# Altium PCB EMG_MainBoard_Layout.PcbDoc (part 7 of 7)
Units mm, origin at the board's own origin, x right, y up, seen from the top; angles counter-clockwise.
Board outline 59.1 x 36 mm, 6 copper layers (L1 TOP, L2 GND, L3 SIGNAL, L4 GND, L5 POWER SIGNAL, L6 BOTTOM), stack 1.146 mm thick; 231 components, 136 nets, 812 pads, 470 vias.
Unrouted connection lines stored in the file: 570.
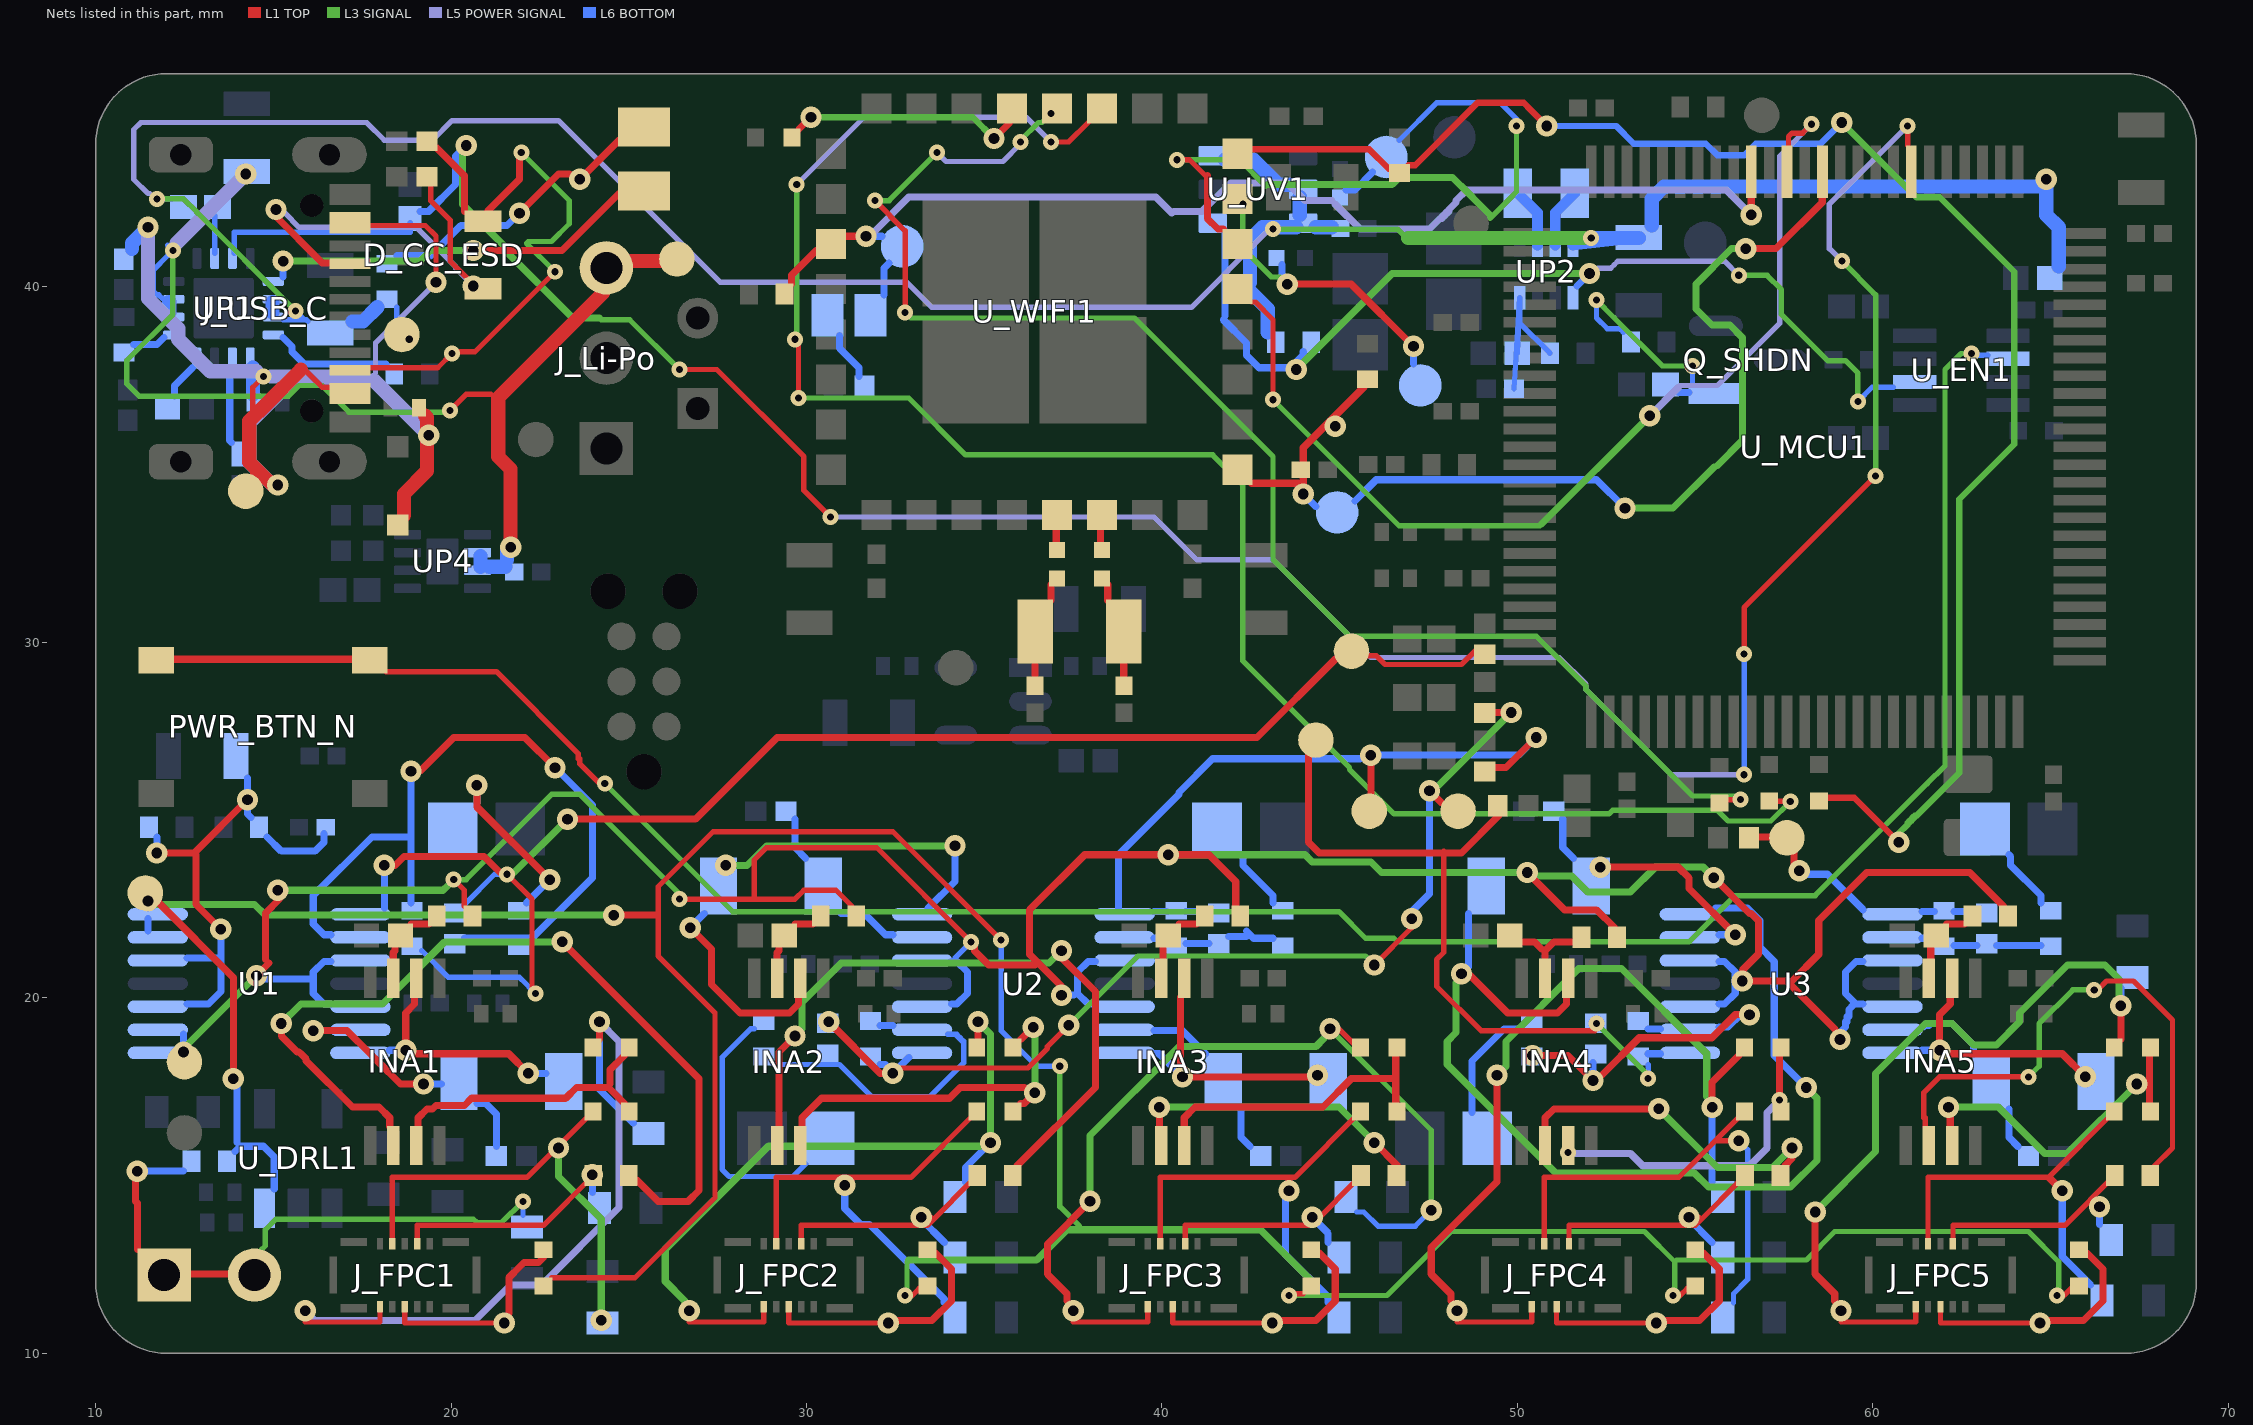
[diagram p8: the nets of this part, all layers, seen from the top]

## Via types
v1: diameter 0.6, hole 0.3, L1 TOP to L6 BOTTOM, 327 vias
v2: diameter 0.45, hole 0.2, L1 TOP to L6 BOTTOM, 138 vias
v3: diameter 0.5, hole 0.3, L1 TOP to L6 BOTTOM, 5 vias

## Nets (pads, with @x,y where several pads share a name; then routed paths per layer and width w, separated by ;. In a path a pad name is that pad's centre, name@x,y a point inside that pad or via, vN(x,y) a via of type N, cw(c..) or ccw(c..) an arc to the next point about the centre after c; other vN are vias at no path point) (continued)
NetC_WIFI_X32_IN_2: C_WIFI_X32_IN.2 R_WIFI_X32_IN.1 X_WIFI_32K.1 | length 0.9
  L1 TOP w0.2: X_WIFI_32K.1@38.475,31.175 R_WIFI_X32_IN.1@38.475,31.625 ; C_WIFI_X32_IN.2@38.925,29.025 X_WIFI_32K.1@38.925,29.425
NetC_WIFI_X32_OUT_2: C_WIFI_X32_OUT.2 R_WIFI_X32_OUT.1 X_WIFI_32K.2 | length 0.9
  L1 TOP w0.2: C_WIFI_X32_OUT.2@36.425,29.025 X_WIFI_32K.2@36.425,29.425 ; X_WIFI_32K.2@36.875,31.175 R_WIFI_X32_OUT.1@36.875,31.625
NetCH_1_2: CH_1.2 RG_1.1 RGN_1.2 U1.2 | length 21.1
  L1 TOP w0.2: v1(18.875,26.375) 19.125,26.375 20.075,27.325 22.075,27.325 v1(22.925,26.475)
  L6 BOTTOM w0.2: U1.2@16.625,21.775 16.425,21.775 16.125,22.075 16.125,22.875 17.775,24.525 18.775,24.525 ; RG_1.1@18.875,22.675 v1(18.875,26.375) ; CH_1.2@20.375,21.675 22.275,21.675 23.975,23.375 23.975,25.425 v1(22.925,26.475)
NetCH_2_2: CH_2.2 RG_2.1 RGN_2.2 U2.2 | length 7.7
  L6 BOTTOM w0.15: RGN_2.2@29.075,18.125 30.925,18.125 31.825,17.225 33.475,17.225 34.425,18.175 34.425,18.775 34.375,18.775 34.375,18.825 34.325,18.825 34.325,18.875 34.275,18.875 34.275,18.925 34.225,18.925 34.225,18.975 U2.2@33.975,18.975
  L6 BOTTOM w0.2: RG_2.1@32.075,19.225 32.425,19.225
NetCH_3_2: CH_3.2 RG_3.1 RGN_3.2 U2.9 | length 2.3
  L6 BOTTOM w0.2: U2.9@39.775,21.675 RG_3.1@40.125,21.675 ; RG_3.1@40.675,21.525 CH_3.2@41.325,21.525 ; CH_3.2@41.875,21.725 42.375,21.725 ; 42.375,21.875 42.575,21.675 RGN_3.2@43.125,21.675
NetCH_4_2: CH_4.2 RG_4.1 RGN_4.2 U3.2 | length 8.7
  L1 TOP w0.2: v1(50.425,18.375) 51.425,18.375 v1(52.125,17.675) ; v1@52.375,17.825 53.425,18.875 55.475,18.875 56.125,19.525 v1(56.525,19.525)
  L6 BOTTOM w0.2: v1(52.125,17.675) CH_4.2@52.125,18.175 ; RG_4.1@53.675,19.125 U3.2@54.025,19.125 ; U3.2@55.675,19.175 55.925,19.175 56.275,19.525 v1(56.525,19.525)
NetCH_5_2: CH_5.2 RG_5.1 RGN_5.2 U3.9 | length 2.2
  L6 BOTTOM w0.2: U3.9@61.375,21.675 RG_5.1@61.725,21.675 ; RG_5.1@62.275,21.475 CH_5.2@62.925,21.475 ; CH_5.2@63.475,21.475 RGN_5.2@64.725,21.475
NetCL_1_1: CL_1.1 RGN_1.1 | length 4.9
  L1 TOP w0.2: v1(20.725,25.975) 20.725,25.375 v1(22.775,23.325)
  L6 BOTTOM w0.2: CL_1.1@20.725,25.475 v1(20.725,25.975) ; RGN_1.1@22.125,22.675 v1(22.775,23.325)
NetCL_2_1: CL_2.1 RGN_2.1 | length 7
  L6 BOTTOM w0.15: RGN_2.1@28.525,19.125 28.425,19.125 27.625,18.325 27.625,15.175 27.825,14.975 29.625,14.975 CL_2.1@29.975,15.325
NetCL_3_1: CL_3.1 RGN_3.1 | length 1.7
  L6 BOTTOM w0.2: CL_3.1@42.225,24.025 42.275,23.975 42.275,23.725 43.125,22.875 RGN_3.1@43.125,22.675
NetCL_4_1: CL_4.1 RGN_4.1 | length 3.2
  L6 BOTTOM w0.2: CL_4.1@48.725,16.775 48.725,18.225 49.625,19.125 RGN_4.1@50.125,19.125
NetCL_5_1: CL_5.1 RGN_5.1 | length 1.7
  L6 BOTTOM w0.2: CL_5.1@63.825,24.025 63.875,23.975 63.875,23.725 64.725,22.875 RGN_5.1@64.725,22.675
NetCservo_1_1: Cservo_1.1 Rservo_1.1 U1.6 | length 6.3
  L1 TOP w0.2: v1(16.125,19.075) 17.075,19.075 17.72,18.43 17.95,18.2 18.575,17.575 v1(19.225,17.575)
  L6 BOTTOM w0.2: v1(16.125,19.075) U1.6@16.625,19.075 ; v1(19.225,17.575) Cservo_1.1@19.725,17.575 ; Cservo_1.1@20.725,17.025 20.975,17.025 21.275,16.725 21.275,15.825
NetCservo_2_1: Cservo_2.1 Rservo_2.1 U2.6 | length 2.9
  L6 BOTTOM w0.2: Rservo_2.1@29.675,25.025 29.675,24.225 Cservo_2.1@29.975,23.925 ; Cservo_2.1@30.975,22.375 31.625,22.375 32.225,21.775 U2.6@32.425,21.775
NetCservo_3_1: Cservo_3.1 Rservo_3.1 U2.13 | length 2.9
  L6 BOTTOM w0.2: U2.13@39.775,19.075 40.575,19.075 Cservo_3.1@41.225,18.425 ; Cservo_3.1@42.225,16.875 42.225,16.075 42.475,15.825
NetCservo_4_1: Cservo_4.1 Rservo_4.1 U3.6 | length 6.4
  L1 TOP w0.2: v1(52.325,23.675) 54.525,23.675 54.825,23.375 54.825,23.075 v1(56.125,21.775)
  L6 BOTTOM w0.2: Rservo_4.1@51.275,25.025 51.275,24.225 Cservo_4.1@51.575,23.925 ; U3.6@55.675,21.775 v1(56.125,21.775)
NetCservo_5_1: Cservo_5.1 Rservo_5.1 U3.13 | length 3.1
  L6 BOTTOM w0.2: U3.13@61.375,19.175 61.425,19.175 61.475,19.225 61.575,19.225 61.625,19.275 62.225,19.275 62.825,18.675 Cservo_5.1@62.825,18.425 ; Cservo_5.1@63.825,16.875 63.825,16.075 64.075,15.825
NetCUP4_FB_1: CUP4_FB.1 RUP_3.1 RUP_4.2 UP2.8 | length 6.1
  L6 BOTTOM w0.15: CUP4_FB.1@49.902,37.133 UP2.8@50.062,39.699 ; RUP_3.1@49.99,38.134 UP2.8@50.062,39.699 ; RUP_4.2@50.912,38.134 50.062,38.984 UP2.8@50.062,39.699
NetD_CC_ESD_1: D_CC_ESD.1 J_USB_C.A5 RJ1.2 | length 11.4
  L1 TOP w0.15: RJ1.2@19.425,42.875 19.425,42.425 19.975,41.875 19.975,40.725 20.425,40.275
  L1 TOP w0.2: v1(15.075,42.175) 15.075,42.1 15.075,41.975 16.3,40.75 16.375,40.675 16.575,40.675
  L5 POWER SIGNAL w0.15: v1@15.325,42.075 15.725,41.675 16.3,41.675 19.025,41.675 20.125,40.575 20.125,40.525 v1(20.625,40.025)
NetD_CC_ESD_2: D_CC_ESD.2 J_USB_C.B5 RJ2.2 | length 15.2
  L1 TOP w0.15: J_USB_C.B5@17.675,37.725 19.625,37.725 v2(20.025,38.125) ; v2@20.225,38.175 20.675,38.175 v2(22.925,40.425)
  L1 TOP w0.2: RJ2.2@19.575,43.925 20.375,43.125 D_CC_ESD.2@20.375,42.125 ; D_CC_ESD.2@21.025,42.125 21.925,43.025 v2@21.925,43.575
  L3 SIGNAL w0.15: v2(21.975,43.775) 23.325,42.425 23.325,41.775 22.825,41.275 22.175,41.275 22.125,41.225 v2(22.925,40.425)
NetINA1_2: INA1.2 RDD2.2 | length 24.2
  L1 TOP w0.2: v1(15.225,19.275) 15.225,18.925 15.675,18.475 15.725,18.475 15.77,18.43 15.925,18.275 15.925,18.225 17.225,16.925 17.95,16.925 17.975,16.925 18.275,16.625 INA1.2@18.275,16.375 ; v1(23.125,21.575) 26.975,17.725 26.975,14.575 26.675,14.275 25.825,14.275 RDD2.2@25.225,14.875
  L3 SIGNAL w0.2: v1(15.225,19.275) 15.775,19.825 18.075,19.825 19.825,21.575 v1(23.125,21.575)
NetINA1_3: INA1.3 RDD1.2 RDD3.2 | length 7.6
  L1 TOP w0.2: INA1.3@19.075,16.375 19.075,16.625 19.325,16.875 19.475,16.875 19.575,16.975 20.375,16.975 20.575,17.175 23.225,17.175 23.525,17.475 24.425,17.475 RDD1.2@24.875,17.025 ; 24.475,17.575 24.475,17.975 RDD3.2@24.875,18.375
NetINA1_7: INA1.7 RH_1.2 RL_1.1 | length 0.9
  L1 TOP w0.2: INA1.7@18.375,21.075 18.375,21.275 18.425,21.325 RH_1.2@18.425,21.475 ; RH_1.2@18.875,22.075 RL_1.1@19.375,22.075
NetINA2_2: INA2.2 RDD5.2 | length 19
  L1 TOP w0.2: INA2.2@29.225,16.375 29.225,18.475 v1(29.675,18.925) ; RDD5.2@35.925,15.275 38.125,17.475 38.125,20.175 37.175,21.125 v1(37.175,21.325)
  L3 SIGNAL w0.2: v1(29.675,18.925) 29.875,19.125 29.875,19.875 30.975,20.975 36.825,20.975 v1(37.175,21.325)
NetINA2_3: INA2.3 RDD4.2 RDD6.2 | length 9.7
  L1 TOP w0.2: INA2.3@29.875,16.375 29.875,16.625 30.425,17.175 34.025,17.175 34.325,17.475 36.125,17.475 ; RDD4.2@36.025,17.025 36.125,17.025 v1(36.425,17.325) ; RDD6.2@36.025,18.825 v1(36.375,19.175)
  L3 SIGNAL w0.2: v1(36.375,19.175) 36.425,19.125 v1(36.425,17.325)
NetINA2_7: INA2.7 RH_2.2 RL_2.1 | length 0.9
  L1 TOP w0.2: INA2.7@29.175,21.075 29.175,21.275 29.225,21.325 RH_2.2@29.225,21.475 ; RH_2.2@29.675,22.075 RL_2.1@30.175,22.075
NetINA3_2: INA3.2 RDD8.2 | length 7.9
  L1 TOP w0.2: INA3.2@39.925,16.375 v1(39.925,16.925) ; v1(45.975,15.925) RDD8.2@46.625,15.275
  L3 SIGNAL w0.2: v1(39.925,16.925) 44.975,16.925 v1(45.975,15.925)
NetINA3_3: INA3.3 RDD7.2 RDD9.2 | length 7.9
  L1 TOP w0.2: INA3.3@40.625,16.375 40.625,16.625 40.925,16.925 44.525,16.925 45.325,17.725 46.475,17.725 ; RDD7.2@46.575,17.025 RDD9.2@46.575,18.375
NetINA3_7: INA3.7 RH_3.2 RL_3.1 | length 0.9
  L1 TOP w0.2: INA3.7@40.025,21.075 RH_3.2@40.025,21.475 ; RH_3.2@40.475,22.075 RL_3.1@40.975,22.075
NetINA4_2: INA4.2 RDD11.2 | length 8.8
  L1 TOP w0.2: INA4.2@50.775,16.375 50.775,16.625 51.025,16.875 v1(53.975,16.875) ; RDD11.2@57.525,15.275 57.725,15.475 v1(57.725,15.775)
  L3 SIGNAL w0.2: v1(53.975,16.875) 55.625,15.225 57.175,15.225 v1(57.725,15.775)
NetINA4_3: INA4.3 RDD10.2 RDD12.2 | length 8.4
  L1 TOP w0.2: RDD10.2@57.375,17.025 RDD12.2@57.375,18.375
  L5 POWER SIGNAL w0.2: v2@51.625,15.625 53.175,15.625 53.525,15.275 56.525,15.275 57.025,15.775 57.025,16.775 v2@57.225,16.975
  other v2: 51.425,15.65 57.375,17.125
NetINA4_7: INA4.7 RH_4.2 RL_4.1 | length 1.8
  L1 TOP w0.2: RH_4.2@50.075,21.575 50.475,21.575 50.675,21.375 ; INA4.7@50.775,21.075 50.775,21.325 51.025,21.575 RL_4.1@51.575,21.575
NetINA5_2: INA5.2 RDD14.2 | length 14.8
  L1 TOP w0.15: INA5.2@61.475,16.375 61.475,16.625 61.425,16.625 61.425,17.325 61.875,17.775 v2(64.375,17.775) ; v2(66.225,20.225) 66.325,20.225 66.575,20.475 67.325,20.475 68.425,19.375 68.425,15.775 RDD14.2@67.925,15.275
  L3 SIGNAL w0.15: v2(64.375,17.775) 64.675,18.075 64.675,19.275 65.625,20.225 v2(66.225,20.225)
NetINA5_3: INA5.3 RDD13.2 RDD15.2 | length 8.8
  L1 TOP w0.2: v1(62.125,16.925) 62.175,16.875 INA5.3@62.175,16.375 ; v1(67.425,17.575) v1@67.675,17.575 ; RDD13.2@67.775,17.025 RDD15.2@67.775,18.375
  L3 SIGNAL w0.2: v1(62.125,16.925) 63.525,16.925 64.825,15.625 65.475,15.625 v1(67.425,17.575)
NetINA5_7: INA5.7 RH_5.2 RL_5.1 | length 0.9
  L1 TOP w0.2: INA5.7@61.625,21.075 RH_5.2@61.625,21.475 ; RH_5.2@62.075,22.075 RL_5.1@62.575,22.075
NetJ_FPC1_8: J_FPC1.8 R_VREF1.2 | length 5.5
  L1 TOP w0.15: J_FPC1.8@18.7,11.17 18.7,10.85 v1(21.5,10.85)
  L1 TOP w0.2: 21.625,11.125 21.625,12.125 21.939,12.439 22.053,12.553 22.459,12.553 22.6,12.694 R_VREF1.2@22.6,12.912
NetJ_FPC2_8: J_FPC2.8 R_VREF2.2 | length 6.4
  L1 TOP w0.15: J_FPC2.8@29.5,11.17 29.5,10.85 v1(32.3,10.85)
  L1 TOP w0.2: v1@32.575,10.925 33.525,10.925 34.075,11.475 34.075,12.375 R_VREF2.2@33.625,12.825
NetJ_FPC3_8: J_FPC3.8 R_VREF3.2 | length 6.4
  L1 TOP w0.15: J_FPC3.8@40.3,11.17 40.3,10.85 v1(43.1,10.85)
  L1 TOP w0.2: v1@43.375,10.925 44.325,10.925 44.875,11.475 44.875,12.375 R_VREF3.2@44.425,12.825
NetJ_FPC4_8: J_FPC4.8 R_VREF4.2 | length 6.4
  L1 TOP w0.15: J_FPC4.8@51.1,11.17 51.1,10.85 v1(53.9,10.85)
  L1 TOP w0.2: v1@54.175,10.925 55.125,10.925 55.675,11.475 55.675,12.375 R_VREF4.2@55.225,12.825
NetJ_FPC5_8: J_FPC5.8 R_VREF5.2 | length 6.4
  L1 TOP w0.15: J_FPC5.8@61.9,11.17 61.9,10.85 v1(64.7,10.85)
  L1 TOP w0.2: v1@64.975,10.925 65.925,10.925 66.475,11.475 66.475,12.375 R_VREF5.2@66.025,12.825
NetJ_REF_1: J_REF.1 J_REF.2 R_DRL_SEL.2 R_ref.1 | length 13.3
  L1 TOP w0.2: 11.175,12.925 11.175,14.225 11.125,14.275 11.125,15.075 v1(11.175,15.125) ; J_REF.1@12.625,12.225 J_REF.2@13.725,12.225
  L3 SIGNAL w0.15: 14.675,12.925 14.775,13.025 14.775,13.278 14.775,13.475 15.075,13.775 15.106,13.775 17.95,13.775 20.625,13.775 20.725,13.675 21.425,13.675 v2(22.025,14.275)
  L6 BOTTOM w0.15: R_DRL_SEL.2@22.025,13.875 v2(22.025,14.275)
  L6 BOTTOM w0.2: v1(11.175,15.125) 11.906,15.125 R_ref.1@12.475,15.125
NetJP_WIFI_BOOT_1: JP_WIFI_BOOT.1 R_WIFI_BOOT_OVR.2 | length 1.4
  L6 BOTTOM w0.2: JP_WIFI_BOOT.1@30.925,38.625 30.925,38.275 31.475,37.725 R_WIFI_BOOT_OVR.2@31.475,37.475
NetL1_1: L1.1 UP2.3 | length 1.7
  L6 BOTTOM w0.3: UP2.3@51.062,41.169 51.062,42.083 L1.1@51.612,42.634
NetL1_2: L1.2 UP2.2 | length 1.7
  L6 BOTTOM w0.3: L1.2@50.012,42.634 50.562,42.083 UP2.2@50.562,41.169
NetLED_CHG_A: LED_CHG.A R_CHG_LED.2 | length 7.4
  L1 TOP w0.2: v1(21.925,42.075) 23.025,43.175 23.325,43.175 ; v1(23.625,43.025) LED_CHG.A@24.725,44.125
  L6 BOTTOM w0.2: R_CHG_LED.2@18.475,40.875 19.425,40.875 20.275,41.725 21.575,41.725 v1(21.925,42.075)
NetLED_CHG_C: LED_CHG.C UP1.9 | length 10.7
  L1 TOP w0.2: v1(20.625,41.025) 23.125,41.025 LED_CHG.C@24.725,42.625
  L3 SIGNAL w0.2: v1(15.275,40.725) 16.3,40.725 19.125,40.725 19.425,41.025 v1(20.625,41.025)
  L6 BOTTOM w0.2: 15.275,40.275 v1(15.275,40.725)
NetPWR_BTN_N_A: PWR_BTN_N.A PWR_BTN_N.B U_EN1.2 | length 66.8
  L1 TOP w0.15: PWR_BTN_N.B@18.175,29.175 21.275,29.175 23.575,26.875 23.575,26.725 23.625,26.725 23.625,26.575 24.175,26.025 v2(24.325,26.025)
  L1 TOP w0.2: PWR_BTN_N.A@12.175,29.525 PWR_BTN_N.B@17.225,29.525
  L3 SIGNAL w0.15: v2(24.325,26.025) 27.925,22.425 44.975,22.425 45.725,21.675 46.525,21.675 46.625,21.575 54.825,21.575 56.125,22.875 58.375,22.875 61.524,26.024 62.025,26.525 62.025,37.675 62.475,38.125 v2(62.775,38.125)
  L6 BOTTOM w0.15: v2(62.775,38.125) 62.825,38.075 U_EN1.2@63.225,38.075
NetQ_SHDN_1: Q_SHDN.1 R_SHDN_G.1 R_SHDN_PD.2 | length 5.7
  L3 SIGNAL w0.15: v2(52.225,39.625) 52.722,39.128 54.075,37.775 v2(54.925,37.775)
  L6 BOTTOM w0.15: v2(52.225,39.625) 52.225,39.125 52.525,38.825 52.722,38.825 52.875,38.825 R_SHDN_PD.2@52.975,38.725 ; Q_SHDN.1@54.925,37.275 v2(54.925,37.775)
  L6 BOTTOM w0.2: R_SHDN_G.1@54.525,37.025 Q_SHDN.1@54.825,37.025
NetR_EN1_BIAS_2: R_EN1_BIAS.2 UP1.6 | length 1.1
  L6 BOTTOM w0.15: UP1.6@13.35,40.95 R_EN1_BIAS.2@13.35,42
NetR_LIM_2: R_LIM.2 UP1.12 | length 3.3
  L6 BOTTOM w0.2: UP1.12@15.275,38.575 15.525,38.325 15.525,38.175 15.875,37.825 16.3,37.825 R_LIM.2@18.175,37.825
NetR_TMR_2: R_TMR.2 UP1.14 | length 2.1
  L6 BOTTOM w0.2: UP1.14@13.775,37.725 13.775,36.7 13.775,35.675 R_TMR.2@13.825,35.625
NetRISET_1: RISET.1 UP1.16 | length 1
  L6 BOTTOM w0.2: 12.225,36.925 12.225,37.225 12.725,37.725
SYS_EN: R_EN.2 U_EN1.6 U_UV1.1 UP2.5 | length 26.3
  L3 SIGNAL w0.15: v2(56.225,40.325) 57.025,40.325 57.425,39.925 57.425,39.225 58.725,37.925 59.225,37.925 59.575,37.575 v2(59.575,36.775)
  L3 SIGNAL w0.2: v1(43.775,37.675) 46.475,40.375 ; 46.525,40.375 48.605,40.375 48.902,40.375 51.725,40.375
  L5 POWER SIGNAL w0.15: v1@52.275,40.525 52.625,40.525 52.722,40.622 52.825,40.725 55.825,40.725 v2(56.225,40.325)
  L6 BOTTOM w0.15: v2(59.575,36.775) 59.975,37.175 U_EN1.6@60.575,37.175
  L6 BOTTOM w0.2: 41.725,39.075 42.375,38.425 42.375,38.075 42.725,37.725 43.625,37.725 43.975,38.075 R_EN.2@43.975,38.175 ; 41.775,39.175 U_UV1.1@41.775,41.575 ; v1@43.725,37.725 v1(43.775,37.675) ; UP2.5@51.675,40.025 v1(52.025,40.375)
TS: R_TS_SER.2 UP1.1 | length 0.9
  L6 BOTTOM w0.2: R_TS_SER.2@11.075,38.375 11.725,38.375 UP1.1@11.925,38.575
USB_PGOOD_N: R_PGOOD.1 U_MCU1.82 UP1.7 | length 75.1
  L1 TOP w0.15: v2(26.425,37.675) 27.475,37.675 29.925,35.225 29.925,34.275 v2(30.675,33.525) ; v2(56.375,29.675) 56.375,30.975 v2(60.075,34.675) ; U_MCU1.82@60.975,43.975 v2(60.975,44.525)
  L3 SIGNAL w0.15: 24.225,39.075 25.025,39.075 v2(26.425,37.675) ; v2(59.125,40.725) 60.075,39.775 v2(60.075,34.675)
  L3 SIGNAL w0.2: v1(20.425,43.975) 20.325,43.875 20.325,42.325 21.525,41.125 21.525,41.025 23.425,39.125 24.175,39.125
  L5 POWER SIGNAL w0.15: v2(30.675,33.525) 39.775,33.525 40.975,32.325 43.125,32.325 45.875,29.575 48.605,29.575 51.175,29.575 51.925,28.825 51.925,28.675 54.325,26.275 v2(56.375,26.275) ; v2(59.125,40.725) 58.775,41.075 58.775,42.325 v2(60.975,44.525)
  L6 BOTTOM w0.15: UP1.7@13.9,40.95 13.9,41.54 18.85,41.54 R_PGOOD.1@18.85,41.8 ; v2(56.375,26.275) v2(56.375,29.675)
  L6 BOTTOM w0.2: R_PGOOD.1@19.125,42.125 19.375,42.125 20.125,42.875 20.125,43.675 v1(20.425,43.975)
Va_1: J_FPC1.2 R_DRL_VA1.1 RDD1.1 | length 13.5
  L1 TOP w0.15: J_FPC1.2@18.35,13.23 18.35,14.95 21.7,14.95 22.138,14.95 RDD1.1@23.988,16.8
  L3 SIGNAL w0.2: v1(23.025,15.775) 23.025,14.975 24.225,13.775 v1(24.225,10.925)
Va_2: J_FPC2.2 R_DRL_VA2.1 RDD4.1 | length 13
  L1 TOP w0.15: J_FPC2.2@29.15,13.23 29.15,14.95 32.5,14.95 32.938,14.95 RDD4.1@34.788,16.8
  L1 TOP w0.2: v1(31.075,14.725) v1@31.275,14.925
  L6 BOTTOM w0.2: v1(31.075,14.725) 31.075,14.075 31.525,13.625 31.775,13.625 33.875,11.525 R_DRL_VA2.1@33.875,11.425
Va_3: J_FPC3.2 R_DRL_VA3.1 RDD7.1 | length 12.2
  L1 TOP w0.15: J_FPC3.2@39.95,13.23 39.95,14.95 43.3,14.95 43.738,14.95 RDD7.1@45.588,16.8
  L1 TOP w0.2: v1(43.575,14.575) 43.575,14.925
  L6 BOTTOM w0.2: v1(43.575,14.575) 43.475,14.475 43.475,12.775 44.675,11.575 R_DRL_VA3.1@44.675,11.425
Va_4: J_FPC4.2 R_DRL_VA4.1 RDD10.1 | length 13.5
  L1 TOP w0.15: J_FPC4.2@50.75,13.23 50.75,14.95 54.1,14.95 54.538,14.95 RDD10.1@56.388,16.8 ; 55.625,15.975 v1(56.225,15.975)
  L6 BOTTOM w0.15: R_DRL_VA4.1@56.075,11.425 56.075,11.675 56.475,12.075 56.475,15.725 v1(56.225,15.975)
Va_5: J_FPC5.2 R_DRL_VA5.1 RDD13.1 | length 11.2
  L1 TOP w0.15: J_FPC5.2@61.55,13.23 61.55,14.95 64.9,14.95 64.938,14.95 RDD13.1@66.788,16.8
  L1 TOP w0.2: 64.975,14.925 v1(65.325,14.575)
  L6 BOTTOM w0.2: v1(65.325,14.575) 65.325,12.725 R_DRL_VA5.1@66.125,11.925
Vb_1: J_FPC1.4 R_DRL_VB1.1 RDD2.1 | length 6.4
  L1 TOP w0.15: J_FPC1.4@19.05,13.23 19.05,13.6 21.7,13.6 22.6,13.6 RDD2.1@24,15
  L6 BOTTOM w0.2: R_DRL_VB1.1@23.975,14.525 v1(23.975,15.025)
Vb_2: J_FPC2.4 R_DRL_VB2.1 RDD5.1 | length 7.1
  L1 TOP w0.15: J_FPC2.4@29.85,13.23 29.85,13.6 32.5,13.6 33.4,13.6 RDD5.1@34.8,15
  L1 TOP w0.2: v1(33.225,13.825) v1@33.475,13.825
  L6 BOTTOM w0.2: v1(33.225,13.825) 33.225,13.775 R_DRL_VB2.1@33.875,13.125
Vb_3: J_FPC3.4 R_DRL_VB3.1 RDD8.1 | length 6.8
  L1 TOP w0.15: J_FPC3.4@40.65,13.23 40.65,13.6 43.3,13.6 44.2,13.6 RDD8.1@45.6,15
  L1 TOP w0.2: v1(44.225,13.825) v1@44.275,13.825
  L6 BOTTOM w0.2: v1(44.225,13.825) 44.675,13.375 R_DRL_VB3.1@44.675,13.125
Vb_4: J_FPC4.4 R_DRL_VB4.1 RDD11.1 | length 7.1
  L1 TOP w0.15: J_FPC4.4@51.45,13.23 51.45,13.6 54.1,13.6 55,13.6 RDD11.1@56.4,15
  L1 TOP w0.2: v1(54.825,13.825) v1@55.075,13.825
  L6 BOTTOM w0.2: v1(54.825,13.825) 54.825,13.775 R_DRL_VB4.1@55.475,13.125
Vb_5: J_FPC5.4 R_DRL_VB5.1 RDD14.1 | length 6.3
  L1 TOP w0.15: J_FPC5.4@62.25,13.23 62.25,13.6 64.9,13.6 65.4,13.6 RDD14.1@66.8,15
  L1 TOP w0.2: v1@66.175,14.325 v1(66.375,14.125)
  L6 BOTTOM w0.2: 66.375,13.625 v1(66.375,14.125)
VBAT_CELL: C_BAT.1 CU6_1.2 J_Li-Po.3 pad.TP_VBAT_CELL UP1.2 UP1.3 UP4.2 UP4.3 | length 30.6
  L1 TOP w0.15: v2(19.975,36.525) 20.425,36.975 21.125,36.975
  L1 TOP w0.4: v1(21.675,32.675) 21.675,34.16 21.675,34.875 21.325,35.225 21.325,36.875 J_Li-Po.3@24.275,39.825 ; J_Li-Po.3@25.075,40.725 pad.TP_VBAT_CELL@25.875,40.725
  L3 SIGNAL w0.15: v2(12.175,41.025) 12.175,39.225 10.9,37.95 10.875,37.925 10.875,37.275 10.9,37.25 11.225,36.925 15.425,36.925 15.725,37.225 16.3,37.225 16.375,37.225 17.125,36.475 19.925,36.475 v2(19.975,36.525)
  L5 POWER SIGNAL w0.4: v2@12.275,41.225 13.15,42.1 v1(14.225,43.175)
  L6 BOTTOM w0.15: 11.875,39.675 11.775,39.775 11.725,39.775 11.625,39.875 11.625,40.475 v2@12.025,40.875 ; v2@12.025,41.175 v2(12.175,41.025)
  L6 BOTTOM w0.4: 12.075,39.275 UP1.3@12.075,39.575 ; UP4.3@20.825,32.125 UP4.2@20.825,32.425 ; UP4.3@21.075,32.125 CU6_1.2@21.525,32.125 ; 21.575,32.325 21.575,32.575 v1(21.675,32.675)
VBUS: C_IN_.1 C_VBUS.2 D_VBUS.1 J_USB_C.A4_B9 J_USB_C.B4_A9 pad.TP_VBUS R_TS_TOP.2 UP1.13 | length 36.2
  L1 TOP w0.15: 14.425,34.725 14.425,36.7 14.425,37.175 v2(14.725,37.475) ; 15.775,37.675 15.875,37.675 16.3,37.25 16.375,37.175 16.575,37.175 ; J_USB_C.A4_B9@17.675,41.725 19.275,41.725 19.575,41.425 v1(19.575,40.125)
  L1 TOP w0.4: v1(15.125,34.425) 14.975,34.425 14.325,35.075 14.325,36.225 14.8,36.7 15.775,37.675 ; D_VBUS.1@18.675,33.575 18.675,34.16 18.675,34.175 19.325,34.825 19.325,36.325 C_VBUS.2@19.275,36.375
  L5 POWER SIGNAL w0.15: 17.875,37.575 17.875,38.425 v1(19.575,40.125)
  L5 POWER SIGNAL w0.4: v1(11.475,41.675) 11.475,39.675 12.325,38.825 12.325,38.525 13.225,37.625 14.525,37.625 ; v2@14.925,37.475 16.3,37.475 16.925,37.475 17.275,37.125 ; v1(15.125,34.425) 14.975,34.425 14.325,35.075 14.325,36.175 14.85,36.7 15.525,37.375 16.3,37.375 17.625,37.375 ; 17.825,37.375 v1(19.375,35.825)
  L6 BOTTOM w0.15: v2@14.575,37.475 v2(14.725,37.475)
  L6 BOTTOM w0.4: 11.025,41.075 11.025,41.225 v1(11.475,41.675) ; C_IN_.1@14.425,36.975 UP1.13@14.425,37.725
Vc_1: J_FPC1.6 R_DRL_VC1.1 RDD3.1 | length 22.2
  L1 TOP w0.15: v1(15.9,11.2) 15.9,10.88 18,10.88 J_FPC1.6@18,11.17
  L1 TOP w0.2: RDD3.1@24.175,18.825 v1(24.175,19.325)
  L5 POWER SIGNAL w0.2: v1(15.9,11.2) 16.175,10.925 20.675,10.925 21.675,11.925 22.55,11.925 24.725,14.1 24.725,18.775 v1(24.175,19.325)
  L6 BOTTOM w0.2: v1(24.175,19.325) 24.175,17.425 R_DRL_VC1.1@25.125,16.475
Vc_2: J_FPC2.6 R_DRL_VC2.1 RDD6.1 | length 19.9
  L1 TOP w0.15: v1(26.7,11.2) 26.7,10.88 28.8,10.88 J_FPC2.6@28.8,11.17
  L1 TOP w0.2: RDD6.1@34.825,18.825 v1(34.825,19.325)
  L3 SIGNAL w0.2: 26.575,11.475 26.025,12.025 26.025,12.925 28.925,15.825 34.875,15.825 ; v1(34.825,19.325) 35.175,18.975 v1(35.175,15.925)
  L6 BOTTOM w0.2: R_DRL_VC2.1@34.475,14.825 34.475,15.225 v1(35.175,15.925)
Vc_3: J_FPC3.6 R_DRL_VC3.1 RDD9.1 | length 25.4
  L1 TOP w0.15: v1(37.5,11.2) 37.5,10.88 39.6,10.88 J_FPC3.6@39.6,11.17 ; v1(44.725,19.125) 44.975,19.125 RDD9.1@45.375,18.725
  L1 TOP w0.2: 37.325,11.475 37.325,11.675 36.775,12.225 36.775,13.075 v1(37.975,14.275)
  L3 SIGNAL w0.15: v1(44.725,19.125) 47.575,16.275 v1(47.575,14.025)
  L3 SIGNAL w0.2: v1(37.975,14.275) 37.975,16.125 40.475,18.625 44.325,18.625 v1@44.575,18.875
  L6 BOTTOM w0.15: R_DRL_VC3.1@45.475,13.975 45.675,13.975 46.075,13.575 47.125,13.575 v1(47.575,14.025)
Vc_4: J_FPC4.6 R_DRL_VC4.1 RDD12.1 | length 23.7
  L1 TOP w0.15: v1(48.3,11.2) 48.3,10.88 50.4,10.88 J_FPC4.6@50.4,11.17
  L1 TOP w0.2: 48.125,11.475 48.125,11.675 47.575,12.225 47.575,12.975 49.425,14.825 v1(49.425,17.825) ; v1(55.475,16.925) 55.475,17.625 RDD12.1@56.225,18.375
  L3 SIGNAL w0.2: v1(49.425,17.825) 49.675,18.075 49.675,18.775 51.725,20.825 52.925,20.825 55.325,18.425 55.325,17.225
  L6 BOTTOM w0.2: R_DRL_VC4.1@55.475,14.825 v1(55.475,16.925)
Vc_5: J_FPC5.6 R_DRL_VC5.1 RDD15.1 | length 20.9
  L1 TOP w0.15: v1(59.1,11.2) 59.1,10.88 61.2,10.88 J_FPC5.6@61.2,11.17
  L1 TOP w0.2: v1(58.375,13.975) 58.375,12.225 58.925,11.675 58.925,11.475 ; RDD15.1@66.975,18.825 v1(66.975,19.775)
  L3 SIGNAL w0.2: v1(58.375,13.975) 60.075,15.675 60.075,17.875 61.475,19.275 62.225,19.275 62.825,18.675 63.475,18.675 64.125,19.325 64.125,19.575 65.475,20.925 66.525,20.925 66.925,20.525 66.925,20.075
  L6 BOTTOM w0.2: v1(66.975,19.775) R_DRL_VC5.1@66.975,20.275
VDiv: Cdiv_1.2 Cdiv_10uF.2 RV1.1 RV2.2 U1.10 U1.12 | length 13
  L1 TOP w0.2: v1(11.725,24.075) 12.775,24.075 v1(14.275,25.575) ; 12.825,24.025 12.825,22.625 v1(13.525,21.925)
  L6 BOTTOM w0.2: v1(11.725,24.075) RV1.1@11.725,24.525 ; U1.10@12.575,19.825 13.175,19.825 13.525,20.175 v1(13.525,21.925) ; U1.12@12.575,21.125 13.425,21.125 ; Cdiv_10uF.2@14.275,26.175 14.275,25.175 RV2.2@14.375,25.075 ; RV2.2@14.825,24.525 15.225,24.125 16.175,24.125 16.425,24.375 Cdiv_1.2@16.425,24.625
VOUT_1: CH_1.1 pad.TP_VOUT_1 R_ADC1.1 RG_1.2 U1.1 | length 42.5
  L1 TOP w0.15: v2(21.575,23.475) 22.275,22.775 22.275,20.225 v2(22.375,20.125) ; pad.TP_VOUT_1@45.775,29.625 46.025,29.625 46.275,29.375 48.425,29.375 48.605,29.555 R_ADC1.1@48.825,29.775
  L1 TOP w0.2: v1(18.125,23.725) 18.425,23.725 18.675,23.975 20.925,23.975 v2@21.375,23.525 ; v1(23.275,25.025) 26.875,25.025 29.175,27.325 42.675,27.325 44.875,29.525
  L3 SIGNAL w0.2: v2@21.775,23.525 v1(23.275,25.025)
  L6 BOTTOM w0.15: RG_1.2@19.175,21.325 19.925,20.575 21.925,20.575 ; CH_1.1@20.375,22.625 21.225,23.475 v2(21.575,23.475) ; 21.975,20.525 v2(22.375,20.125)
  L6 BOTTOM w0.2: U1.1@18.125,22.525 v1(18.125,23.725)
VOUT_2: CH_2.1 pad.TP_VOUT_2 R_ADC2.1 RG_2.2 U2.1 | length 27.1
  L1 TOP w0.15: v1@32.675,18.025 36.225,18.025 36.775,18.575 36.775,18.625 v1(37.375,19.225) ; v1(45.975,20.925) v1@47.025,21.975
  L1 TOP w0.2: v1(30.625,19.325) 32.075,17.875 v1(32.425,17.875) ; v1(47.525,25.825) 47.875,25.475 ; R_ADC2.1@49.325,28.025 v1(49.825,28.025)
  L3 SIGNAL w0.15: v1(37.375,19.225) 39.325,21.175 45.725,21.175 v1(45.975,20.925)
  L3 SIGNAL w0.2: v1@47.775,25.975 48.605,26.805 v1(49.825,28.025)
  L6 BOTTOM w0.2: RG_2.2@32.075,18.125 32.225,18.125 ; v1(32.425,17.875) U2.1@32.875,18.325 ; v1(47.025,22.225) 47.025,22.425 47.525,22.925 v1(47.525,25.825)
VOUT_3: CH_3.1 pad.TP_VOUT_3 R_ADC3.1 RG_3.2 U2.8 | length 18
  L1 TOP w0.2: pad.TP_VOUT_3@45.875,25.725 v1(45.875,26.825) ; R_ADC3.1@49.325,26.475 49.675,26.475 v1(50.525,27.325)
  L6 BOTTOM w0.2: 38.775,22.525 38.775,24.025 40.475,25.725 40.475,25.775 41.425,26.725 45.575,26.725 ; U2.8@39.775,22.425 RG_3.2@40.125,22.425 ; RG_3.2@40.675,22.425 CH_3.1@41.325,22.425 ; v1(45.875,26.825) 48.605,26.825 50.025,26.825 v1(50.525,27.325)
VOUT_4: CH_4.1 pad.TP_VOUT_4 R_ADC4.1 RG_4.2 U3.1 | length 20.1
  L1 TOP w0.15: 47.925,24.125 47.925,21.275 47.725,21.075 47.725,20.325 48.975,19.075 v2@52.175,19.075
  L1 TOP w0.2: pad.TP_VOUT_4@44.125,26.825 44.125,24.375 44.425,24.075 48.425,24.075 R_ADC4.1@49.475,25.125
  L3 SIGNAL w0.15: v2(52.225,19.275) 53.675,17.825 v2(53.675,17.725)
  L6 BOTTOM w0.15: v2(53.675,17.725) RG_4.2@53.675,18.125
  L6 BOTTOM w0.2: RG_4.2@53.675,18.425 U3.1@54.025,18.425
VOUT_5: CH_5.1 pad.TP_VOUT_5 R_ADC5.1 RG_5.2 U3.8 | length 3.9
  L1 TOP w0.2: R_ADC5.1@56.725,24.525 pad.TP_VOUT_5@57.125,24.525 ; pad.TP_VOUT_5@57.775,24.075 57.775,23.725 v1(57.925,23.575)
  L6 BOTTOM w0.2: v1@58.175,23.475 58.725,23.475 59.725,22.475 ; U3.8@61.375,22.425 RG_5.2@61.725,22.425 ; RG_5.2@62.275,22.425 CH_5.1@62.925,22.425
VREF_A: pad.TP_VREF_A RL_1.2 RL_2.2 RL_3.2 RL_4.2 RL_5.2 U1.3 U1.5 U1.8 U1.9 U2.3 U2.5 U2.10 U2.12 U3.3 U3.5 U3.10 U3.12 | length 91.9
  L1 TOP w0.15: v2(20.075,23.325) 20.375,23.025 RL_1.2@20.375,22.575 ; v2(26.425,22.775) 29.675,22.775 29.925,23.025 30.825,23.025 RL_2.2@31.275,22.575 ; 28.525,22.825 28.525,23.875 28.875,24.225 31.975,24.225 v2(34.625,21.575)
  L1 TOP w0.2: v1(14.525,20.625) 14.875,20.975 ; 14.775,21.075 14.775,22.375 v1@15.175,22.775 ; v2@34.725,21.425 34.725,21.325 35.125,20.925 36.425,20.925 ; v1(37.175,20.075) 37.175,20.325 36.275,21.225 36.275,22.475 37.825,24.025 41.325,24.025 42.075,23.275 RL_3.2@42.075,22.575 ; v1(50.275,23.525) 51.325,22.475 52.225,22.475 RL_4.2@52.725,21.975 ; v1(55.525,23.375) 56.525,22.375 56.575,22.375 56.775,22.175 56.775,21.225 56.325,20.775 ; v1(56.325,20.475) 57.575,20.475 58.925,19.125 ; 57.725,20.475 58.475,21.225 58.475,22.175 59.825,23.525 62.725,23.525 RL_5.2@63.675,22.575
  L3 SIGNAL w0.15: v2(20.075,23.325) 20.425,23.325 22.825,25.725 23.625,25.725 26.425,22.925 v2(26.425,22.775)
  L3 SIGNAL w0.2: v1@12.625,18.725 v1(14.525,20.625) ; v1(15.125,23.025) 19.775,23.025 v2@19.925,23.175 ; v1(40.175,24.025) 44.025,24.025 44.225,23.825 45.875,23.825 46.175,23.525 v1(50.275,23.525) ; v1@50.525,23.425 51.525,23.425 51.975,22.975 53.175,22.975 53.875,23.675 55.225,23.675 v1(55.525,23.375)
  L6 BOTTOM w0.15: 34.175,21.125 v2(34.625,21.575)
  L6 BOTTOM w0.2: v1(12.475,18.475) U1.9@12.475,18.975 ; v1@14.775,20.525 16.025,20.525 ; U1.5@16.625,19.825 16.425,19.825 16.125,20.125 16.125,20.725 16.425,21.025 U1.3@16.625,21.025 ; U2.3@34.075,19.825 34.225,19.825 34.525,20.125 34.525,20.725 34.225,21.025 U2.5@34.075,21.025 ; v1(37.175,20.075) 37.525,20.075 ; U2.12@38.125,19.825 37.925,19.825 37.625,20.125 37.625,20.725 37.925,21.025 U2.10@38.125,21.025 ; U3.3@55.675,19.825 55.825,19.825 56.125,20.125 56.125,20.725 55.825,21.025 U3.5@55.675,21.025 ; v1@56.175,20.475 v1(56.325,20.475) ; v1(59.075,18.825) 59.075,19.025 59.225,19.175 59.225,19.325 59.275,19.325 59.275,19.475 59.325,19.475 59.325,19.675 59.425,19.775 ; U3.12@59.725,19.825 59.525,19.825 59.225,20.125 59.225,20.725 59.525,21.025 U3.10@59.725,21.025
VREF_B_SRC: pad.TP_VREF_B_SRC R_ref.2 R_VREF1.1 R_VREF2.1 R_VREF3.1 R_VREF4.1 R_VREF5.1 U1.13 U1.14 U_DRL1.3 | length 101.3
  L1 TOP w0.15: R_VREF1.1@22.825,12.125 25.175,12.125 27.425,14.375 27.425,19.575 25.825,21.175 25.825,23.125 27.375,24.675 32.425,24.675 v2(35.475,21.625) ; v2(32.775,11.625) 32.975,11.625 R_VREF2.1@33.175,11.825 ; v2(43.575,11.625) 43.625,11.675 R_VREF3.1@43.975,11.675 ; v2(54.375,11.625) 54.575,11.625 R_VREF4.1@54.775,11.825 ; v2(65.175,11.625) 65.375,11.625 R_VREF5.1@65.575,11.825
  L1 TOP w0.2: pad.TP_VREF_B_SRC@11.775,22.675 13.875,20.575 13.875,18.43 v1(13.875,17.725) ; v1(24.575,22.325) 25.775,22.325
  L3 SIGNAL w0.15: v2(32.775,11.625) 32.825,11.675 32.825,12.575 ; v2(37.125,18.075) 37.125,14.125 37.675,13.575 ; v2(43.575,11.625) 46.325,11.625 48.125,13.425 53.575,13.425 54.425,12.575 54.425,11.675 v2(54.375,11.625) ; 54.475,12.625 58.125,12.625 58.925,13.425 64.375,13.425 65.225,12.575 65.225,11.675 v2(65.175,11.625)
  L3 SIGNAL w0.2: v1@11.725,22.625 14.475,22.625 14.775,22.325 v1(24.575,22.325) ; 32.875,12.625 36.475,12.625 37.325,13.475 42.775,13.475 44.325,11.925 44.325,11.675
  L6 BOTTOM w0.15: v2(35.475,21.625) 35.475,19.075 36.475,18.075 v2(37.125,18.075)
  L6 BOTTOM w0.2: 11.475,21.875 U1.14@11.475,22.225 ; U1.14@11.475,22.525 v1(11.475,22.725) ; v1(13.875,17.725) 13.975,17.625 13.975,15.925 ; R_ref.2@13.925,15.675 14.028,15.778 14.075,15.825 14.725,15.825 14.772,15.778 15.025,15.525 U_DRL1.3@15.025,14.625
Vservo_1: Cservo_1.2 INA1.6 U1.7 | length 6
  L1 TOP w0.2: v1(18.725,18.525) 18.725,19.575 18.975,19.825 INA1.6@18.975,20.025 ; v1@18.975,18.425 21.625,18.425 v1(22.175,17.875)
  L6 BOTTOM w0.2: U1.7@18.275,18.525 v1(18.725,18.525) ; v1(22.175,17.875) Cservo_1.2@22.675,17.875
Vservo_2: Cservo_2.2 INA2.6 U2.7 | length 14.2
  L1 TOP w0.2: v1(26.725,21.975) 27.325,21.375 27.325,20.375 28.125,19.575 29.525,19.575 29.775,19.825 INA2.6@29.775,20.025
  L3 SIGNAL w0.2: v1(27.725,23.725) 28.325,23.725 28.875,24.275 v1(34.175,24.275)
  L6 BOTTOM w0.2: v1(26.725,21.975) Cservo_2.2@27.125,22.375 ; 33.425,22.525 34.175,23.275 v1(34.175,24.275)
Vservo_3: Cservo_3.2 INA3.6 U2.14 | length 6.8
  L1 TOP w0.2: 40.525,18.075 INA3.6@40.525,20.025 ; v1(40.575,17.775) 44.325,17.775 v1(44.375,17.825)
  L6 BOTTOM w0.2: U2.14@39.775,18.425 39.925,18.425 v1(40.575,17.775)
Vservo_4: Cservo_4.2 INA4.6 U3.7 | length 28.8
  L1 TOP w0.2: v1(48.425,20.675) 48.625,20.675 49.725,19.575 51.125,19.575 51.375,19.825 INA4.6@51.375,20.025
  L3 SIGNAL w0.2: v1@48.275,20.425 48.275,19.025 48.025,18.775 48.025,18.125 51.075,15.075 54.975,15.075 55.375,14.675 57.675,14.675 58.425,15.425 58.425,17.175 v1(58.125,17.475)
  L6 BOTTOM w0.2: v1(48.425,20.675) 48.625,20.875 Cservo_4.2@48.625,22.375 ; 55.575,22.525 56.475,22.525 56.825,22.175 56.825,21.425 57.225,21.025 57.225,18.375 v1(58.125,17.475)
Vservo_5: Cservo_5.2 INA5.6 U3.14 | length 6.2
  L1 TOP w0.2: v1(61.875,18.525) 61.875,19.525 62.175,19.825 INA5.6@62.175,20.025 ; v1@62.125,18.425 65.325,18.425 v1(65.975,17.775)
  L6 BOTTOM w0.2: U3.14@61.375,18.525 v1(61.875,18.525)
VSYS: C_OUT_.1 C_UV_BYPASS.1 CUP4_1.1 pad.TP_VSYS R_CHG_LED.1 R_EN1_1.1 R_EN1_BIAS.1 R_EN.1 U_UV1.3 U_UV1.5 U_UV1.6 UP1.10 UP1.11 UP2.4 | length 80
  L3 SIGNAL w0.15: v2(11.725,42.475) 12.475,42.475 12.85,42.1 ; 12.875,42.075 v2@15.475,39.475 ; v2(43.125,41.625) 46.625,41.625 46.875,41.375
  L3 SIGNAL w0.4: 46.925,41.375 48.605,41.375 48.902,41.375 v2@51.875,41.375
  L5 POWER SIGNAL w0.15: 11.525,42.625 11.475,42.625 11.075,43.025 11.075,44.425 11.275,44.625 17.625,44.625 18.125,44.125 19.475,44.125 20.025,44.675 23.025,44.675 27.525,40.175 27.575,40.125 32.825,40.125 33.525,39.425 40.825,39.425 v2@42.925,41.525
  L6 BOTTOM w0.15: v2(11.725,42.475) R_EN1_BIAS.1@12.125,42.475 ; UP1.11@15.275,39.075 15.925,39.075 C_OUT_.1@15.975,39.025 ; v2(15.625,39.325) 15.825,39.125 ; R_CHG_LED.1@18.475,39.425 18.475,38.875 v2(18.825,38.525) ; v2(43.125,41.625) U_UV1.6@43.575,41.625
  L6 BOTTOM w0.3: UP2.4@51.562,41.169 CUP4_1.1@53.412,41.384
  L6 BOTTOM w0.4: 14.975,39.275 UP1.10@14.975,39.575 ; C_OUT_.1@17.225,39.025 17.525,39.025 R_CHG_LED.1@17.925,39.425 ; U_UV1.3@41.775,43.575 42.575,43.575 43.275,42.875 U_UV1.5@43.575,42.875 ; 42.425,39.925 42.975,39.375 R_EN.1@42.975,38.725 ; 42.475,40.125 42.475,41.325 42.825,41.675 43.075,41.675 U_UV1.6@43.775,41.675 ; U_UV1.6@43.875,42.025 U_UV1.5@43.875,42.525 ; U_UV1.6@44.325,41.675 C_UV_BYPASS.1@44.775,41.675 ; v2(52.075,41.375) CUP4_1.1@53.412,41.375 ; CUP4_1.1@53.775,41.725 53.775,42.475 54.125,42.825 v1@64.675,42.825 ; v1(64.875,43.025) 64.875,42.025 65.225,41.675 R_EN1_1.1@65.225,40.575
WIFI_BOOT: JP_WIFI_BOOT.2 R_WIFI_BOOT_PD.2 TP_WIFI_BOOT.TP U_MCU1.91 U_WIFI1.3 | length 30.6
  L1 TOP w0.2: R_WIFI_BOOT_PD.2@29.575,40.075 29.575,40.325 U_WIFI1.3@30.275,41.025 ; U_WIFI1.3@31.075,41.425 v1(31.675,41.425) ; v1(56.575,42.025) U_MCU1.91@56.575,42.525
  L5 POWER SIGNAL w0.2: v1@31.925,41.575 32.875,42.525 39.825,42.525 40.275,42.075 ; 40.325,42.125 41.125,42.125 41.925,42.925 43.525,42.925 44.025,42.425 44.775,42.425 ; 44.875,42.325 45.575,41.625 47.525,41.625 47.825,41.925 47.875,41.925 47.875,41.975 47.925,41.975 47.925,42.025 47.975,42.025 47.975,42.075 48.025,42.075 48.025,42.125 48.075,42.125 48.075,42.175 48.275,42.375 48.275,42.425 48.575,42.725 48.605,42.725 55.875,42.725 v1(56.575,42.025)
  L6 BOTTOM w0.2: v1(31.675,41.425) 32.125,41.425 ; JP_WIFI_BOOT.2@32.175,39.775 32.175,40.525 TP_WIFI_BOOT.TP@32.325,40.675
WIFI_CHIP_EN: C_WIFI_EN.1 R_WIFI_EN_PD.1 TP_WIFI_CHIP_EN.TP U_MCU1.87 U_WIFI1.17 | length 27.3
  L1 TOP w0.2: U_WIFI1.17@42.525,34.475 43.825,34.475 ; v1(43.975,34.175) C_WIFI_EN.1@43.975,34.675 ; C_WIFI_EN.1@43.975,35.075 43.975,35.475 R_WIFI_EN_PD.1@45.675,37.175 ; v1@44.675,36.075 v1(44.875,36.075) ; v1(56.425,41.075) 57.275,41.075 58.575,42.375 U_MCU1.87@58.575,42.525
  L3 SIGNAL w0.2: v1(53.025,33.775) 54.375,33.775 55.525,34.925 ; 55.625,34.975 56.325,35.675 56.325,38.575 55.975,38.925 55.475,38.925 55.025,39.375 55.025,40.075 56.025,41.075 v1(56.425,41.075)
  L6 BOTTOM w0.2: v1(43.975,34.175) 44.325,33.825 ; TP_WIFI_CHIP_EN.TP@45.425,33.975 46.025,34.575 48.605,34.575 52.225,34.575 v1(53.025,33.775)
WIFI_SPI_CLK: R_SPI_SCK.1 U_WIFI1.28 | length 41.1
  L1 TOP w0.15: v2(31.925,42.425) 32.775,41.575 v2(32.775,39.275) ; R_SPI_SCK.1@55.875,25.575 v2(56.275,25.575)
  L3 SIGNAL w0.15: v2(31.925,42.425) 32.325,42.425 v2(33.675,43.775) ; v2(32.775,39.275) 32.925,39.125 39.225,39.125 43.125,35.225 43.125,32.325 45.275,30.175 48.605,30.175 50.525,30.175 51.925,28.775 51.925,28.675 54.575,26.024 54.925,25.675 56.175,25.675 v2(56.275,25.575) ; v2(36.025,44.075) 36.025,44.125 36.525,44.625 36.625,44.625 v2(36.875,44.875)
  L5 POWER SIGNAL w0.15: v2(33.675,43.775) 33.925,43.525 35.525,43.525 36.025,44.025 v2(36.025,44.075)
WIFI_SPI_CS: R_SPI_CS.1 R_WIFI_CS_PD.1 U_WIFI1.24 | length 44.7
  L1 TOP w0.18: U_WIFI1.24@42.525,43.875 45.825,43.875 46.375,43.325 ; R_WIFI_CS_PD.1@46.925,43.425 47.125,43.425 48.605,44.904 48.676,44.976 48.875,45.175 50.175,45.175 50.374,44.976 v1(50.825,44.525) ; R_SPI_CS.1@58.675,25.625 59.475,25.625 v1(60.725,24.375)
  L3 SIGNAL w0.18: v1(59.125,44.625) 61.225,42.525 61.875,42.525 63.975,40.425 63.975,35.575 62.425,34.025 62.425,26.325 62.125,26.024 61.225,25.125 61.175,25.125 61.175,25.075 61.125,25.075 61.125,25.025 61.075,25.025 61.075,24.975 61.025,24.975 61.025,24.925 60.975,24.925 60.975,24.875 60.725,24.625 v1(60.725,24.375)
  L6 BOTTOM w0.18: v1(50.825,44.525) 52.775,44.525 53.275,44.025 55.3,44.025 55.625,43.7 56.375,43.7 56.7,44.025 58.525,44.025 v1(59.125,44.625)
WIFI_SPI_MISO: R_SPI_MISO.1 U_WIFI1.29 | length 6.5
  L1 TOP w0.18: R_SPI_MISO.1@29.775,44.425 v1(30.125,44.775) ; v1(35.275,44.175) U_WIFI1.29@35.725,44.625
  L3 SIGNAL w0.18: v1(30.125,44.775) 34.675,44.775 v1(35.275,44.175)
WIFI_SPI_MOSI: R_SPI_MOSI.1 U_WIFI1.27 | length 52
  L1 TOP w0.15: v2(29.675,38.525) 29.775,38.425 v2(29.775,36.875) ; v2(36.875,44.075) 37.375,44.075 U_WIFI1.27@37.925,44.625 ; R_SPI_MOSI.1@57.275,25.525 v2(57.675,25.525)
  L3 SIGNAL w0.15: v2(29.675,38.525) 29.725,38.575 v2(29.725,42.875) ; v2(29.775,36.875) 32.875,36.875 34.475,35.275 41.425,35.275 42.275,34.425 42.275,29.475 45.275,26.475 45.275,26.425 46.525,25.175 52.575,25.175 52.675,25.275 55.625,25.275 55.925,24.975 57.125,24.975 v2(57.675,25.525)
  L5 POWER SIGNAL w0.15: v2(29.725,42.875) 31.625,44.775 36.175,44.775 v2(36.875,44.075)
WIFI_SPI_RDY: U_MCU1.89 U_WIFI1.21 | length 28
  L1 TOP w0.15: U_WIFI1.21@42.525,39.575 42.625,39.575 43.125,39.075 v2(43.125,36.825) ; U_MCU1.89@57.625,43.975 57.625,44.225 57.725,44.325 58.025,44.325 v2(58.275,44.575)
  L3 SIGNAL w0.15: v2(43.125,36.825) 46.675,33.275 48.605,33.275 50.625,33.275
  L3 SIGNAL w0.2: 50.675,33.325 v1(53.725,36.375)
  L5 POWER SIGNAL w0.15: 54.575,37.225 55.625,37.225 57.375,38.975 57.375,43.675 v2(58.275,44.575)
  L5 POWER SIGNAL w0.2: v1(53.725,36.375) 54.525,37.175
WIFI_UART_RX: R_WIFI_UART_TX_LINK.1 TP_WIFI_UART_RX.TP U_WIFI1.23 | length 8.3
  L1 TOP w0.2: v1(43.525,40.075) 45.325,40.075 v1(47.075,38.325)
  L3 SIGNAL w0.15: v2(42.275,42.325) 42.275,41.075 43.075,40.275 43.325,40.275 v1(43.525,40.075)
  L6 BOTTOM w0.2: R_WIFI_UART_TX_LINK.1@43.375,40.625 43.375,40.225 v1(43.525,40.075) ; 47.075,37.825 v1(47.075,38.325)
WIFI_UART_TX: R_WIFI_UART_RX_LINK.1 TP_WIFI_UART_TX.TP U_WIFI1.22 | length 20.3
  L1 TOP w0.15: v2(40.425,43.575) 40.775,43.575 41.225,43.125
  L1 TOP w0.2: 41.275,43.125 41.275,41.925 41.575,41.625 U_WIFI1.22@41.725,41.625
  L3 SIGNAL w0.15: v2(40.425,43.575) 42.175,43.575 42.925,42.825 ; 49.225,41.925 49.799,42.499 49.975,42.675 v2(49.975,44.525)
  L3 SIGNAL w0.2: 42.975,42.875 46.475,42.875 46.675,43.075 48.175,43.075 48.605,42.646 48.902,42.348 49.225,42.025
  L6 BOTTOM w0.15: TP_WIFI_UART_TX.TP@46.675,44.125 47.725,45.175 49.525,45.175 49.725,44.976 49.975,44.725 v2(49.975,44.525)
  L6 BOTTOM w0.2: R_WIFI_UART_RX_LINK.1@45.175,42.725 45.425,42.725 TP_WIFI_UART_TX.TP@45.925,43.225
WIFI_X32_RAW_IN: R_WIFI_X32_IN.2 U_WIFI1.14 | length 0.4
  L1 TOP w0.2: R_WIFI_X32_IN.2@38.275,32.825 U_WIFI1.14@38.275,33.225
WIFI_X32_RAW_OUT: R_WIFI_X32_OUT.2 U_WIFI1.13 | length 0.4
  L1 TOP w0.2: R_WIFI_X32_OUT.2@37.025,32.825 U_WIFI1.13@37.025,33.225
pads on no net: J_SWD. J_USB_C. J_USB_C.A6 J_USB_C.A7 J_USB_C.A8 J_USB_C.B6 J_USB_C.B7 J_USB_C.B8 U_MCU1.1 U_MCU1.2 U_MCU1.3 U_MCU1.4 U_MCU1.5 U_MCU1.7 U_MCU1.8 U_MCU1.9 U_MCU1.12 U_MCU1.13 U_MCU1.15 U_MCU1.16 U_MCU1.17 U_MCU1.18 U_MCU1.29 U_MCU1.34 U_MCU1.36 U_MCU1.37 U_MCU1.38 U_MCU1.39 U_MCU1.40 U_MCU1.41 U_MCU1.42 U_MCU1.43 U_MCU1.44 U_MCU1.45 U_MCU1.46 U_MCU1.47 U_MCU1.51 U_MCU1.52 U_MCU1.53 U_MCU1.54 U_MCU1.55 U_MCU1.56 U_MCU1.57 U_MCU1.58 U_MCU1.59 U_MCU1.60 U_MCU1.61 U_MCU1.62 U_MCU1.63 U_MCU1.64 U_MCU1.65 U_MCU1.66 U_MCU1.67 U_MCU1.68 U_MCU1.69 U_MCU1.70 U_MCU1.71 U_MCU1.77 U_MCU1.78 U_MCU1.79 U_MCU1.80 U_MCU1.84 U_MCU1.88 U_MCU1.90 U_MCU1.97 U_MCU1.98 U_UV1.4 U_WIFI1.1 U_WIFI1.2 U_WIFI1.4 U_WIFI1.5 U_WIFI1.6 U_WIFI1.7 U_WIFI1.8 U_WIFI1.11 U_WIFI1.12 U_WIFI1.19 U_WIFI1.20 U_WIFI1.31 UP1.17@13.6,39.4 UP3.4

## Polygon pours and split planes (outlines as drawn)
GND on L2 GND "EMG_L2_COMMON_GND" (solid, remove dead copper, pour order 0): 10.5,10.5 68.6,10.5 68.6,45.5 10.5,45.5
GND on L6 BOTTOM "EMG_L6_BOTTOM_GND" (solid, remove dead copper, pour order 1): 10.5,10.5 68.6,10.5 68.6,45.5 10.5,45.5
GND on L4 GND "EMG_L4_GND_PLANE" (solid, remove dead copper, pour order 2): 10.5,10.5 68.6,10.5 68.6,45.5 10.5,45.5
GND on L5 POWER SIGNAL "EMG_L5_GND_FILL" (solid, remove dead copper, pour order 4): 10.5,27.5 31.3,27.5 31.3,30.7 36.1,30.7 36.1,27.5 47.8,27.5 47.8,25.6 68.6,25.6 68.6,45.5 10.5,45.5
3V0_ANA on L5 POWER SIGNAL "EMG_L5_3V0_ANA" (solid, remove dead copper, pour order 3): 10.5,10.5 68.6,10.5 68.6,25.3 47.5,25.3 47.5,27.2 35.8,27.2 35.8,30.4 31.6,30.4 31.6,27.2 10.5,27.2
GND on L1 TOP "EMG_L1_TOP_GND" (solid, remove dead copper, pour order 5): 10.5,10.5 68.6,10.5 68.6,45.5 10.5,45.5

## Keep-outs
Keep-Out Layer:
  region: 30.27,45.44 42.55,45.44 42.55,50.44 30.27,50.44

## Silkscreen, mask and mechanical layers (free items; w line width, h text height)
Mechanical 4:
  lines w0.08: 18,13.087 18,14.2 ; 18.7,6 18.7,11.1 ; 28.8,13.087 28.8,14.2 ; 29.5,6 29.5,11.1 ; 39.6,13.087 39.6,14.2 ; 40.3,6 40.3,11.1 ; 50.4,13.087 50.4,14.2 ; 51.1,6 51.1,11.1 ; 61.2,13.087 61.2,14.2 ; 61.9,6 61.9,11.1
  text "COMMON GND - NO AGND / DGND SPLIT" at 33,63 h0.65
  text "ANTENNA: NO COPPER / VIAS / METAL / BATTERY" at 32,61 h0.65
  text "REMOTE NTC: ONE 103AT-2 ON CELL; P1 GND / P2 BAT_TEMP" at 10,57 h0.65
  text "SWD 1 VTREF / 2 IO / 3 GND / 4 CLK / 5 NRST" at 92,42 h0.65
  text "SIG1" at 19.4,14.4 h0.65
  text "SIG1" at 32.4,14.4 h0.65
  text "SIG1" at 45.4,14.4 h0.65
  text "SIG1" at 58.4,14.4 h0.65
  text "SIG1" at 71.4,14.4 h0.65
  text "CH1 / MAIN END" at 19,8 h0.65
  text "CH2 / MAIN END" at 32,8 h0.65
  text "CH3 / MAIN END" at 45,8 h0.65
  text "CH4 / MAIN END" at 58,8 h0.65
  text "CH5 / MAIN END" at 71,8 h0.65
  text "FLEX FOLD / KEYING / TOOL ENVELOPES TBD - DO NOT REVERSE" at 14,4 h0.65
  text "TRIAL 80 x 45 mm / R2 - NOT FABRICATION RELEASE" at 31,2 h0.65

## Text inside footprints (layer, text, board x,y; h text height)
J_USB_C: Top 3D Body "PCB EDGE" at 9.9,34 h0.41 r270